# Altium PCB x-.PcbDoc
Units mm, origin at the board's own origin, x right, y up, seen from the top; angles counter-clockwise.
Board outline 327 x 80 mm, 2 copper layers (Top Layer, Bottom Layer); 121 components, 50 nets, 242 pads, 48 vias.
Unrouted connection lines stored in the file: 72.
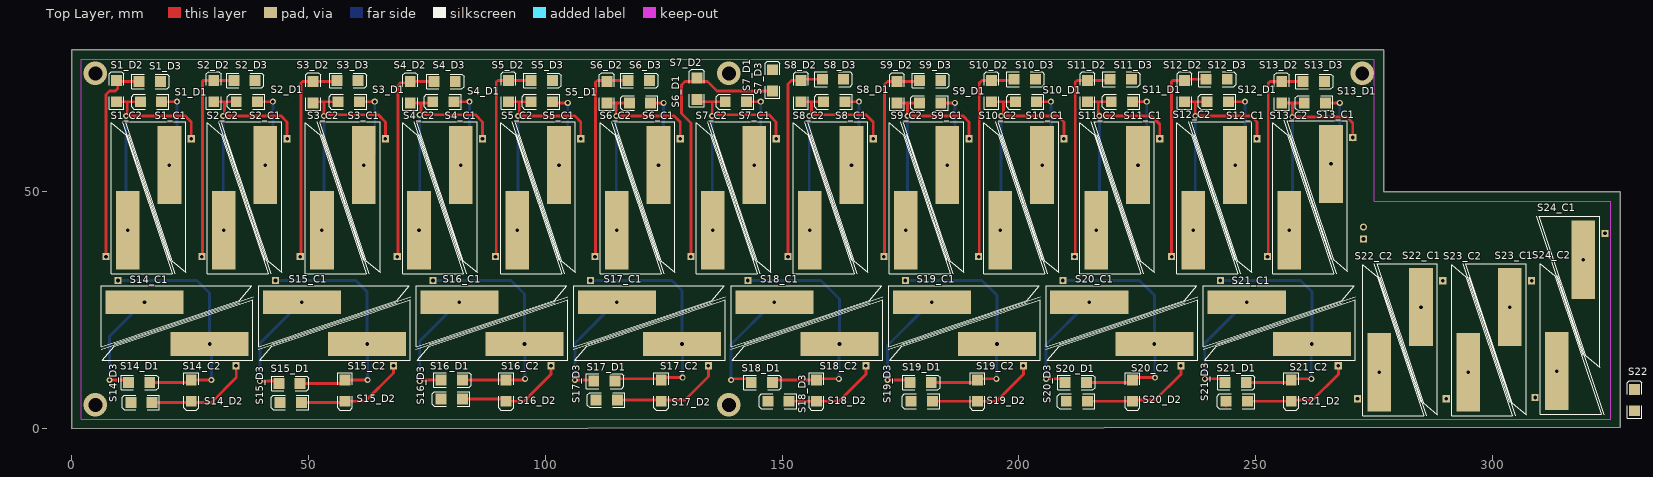
[diagram p0: Top Layer view]
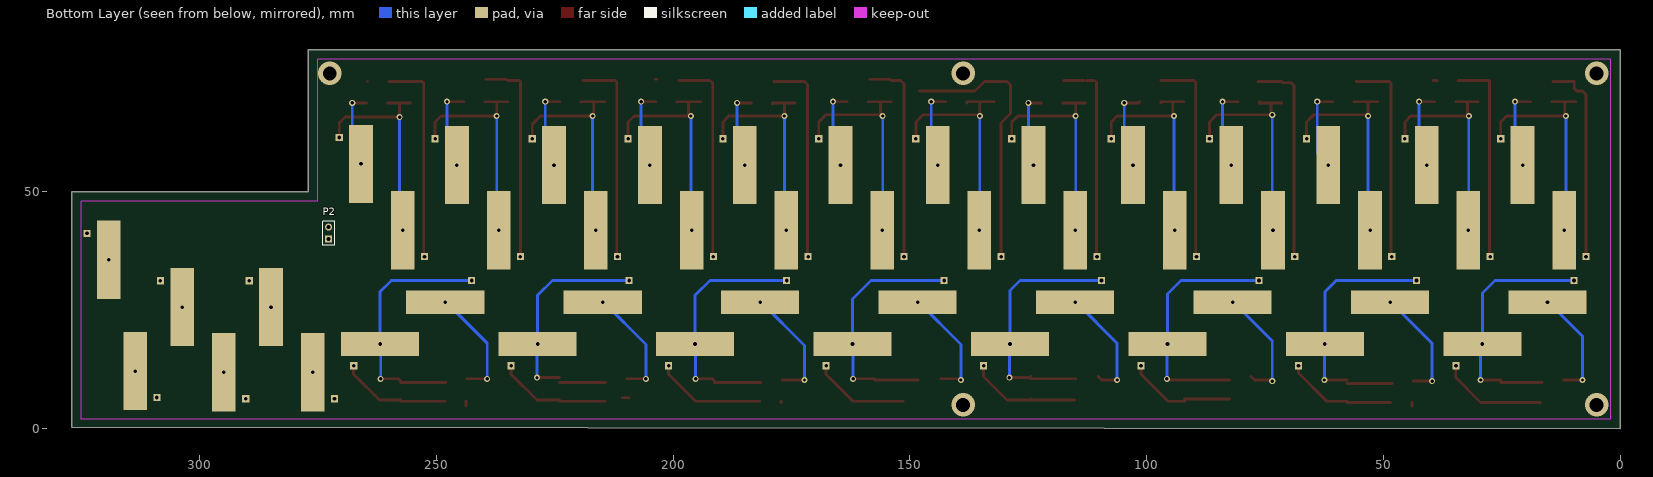
[diagram p1: Bottom Layer view, seen from below]

## Layer stack, top to bottom
Top Solder: solder mask 0.0102, Solder Resist, Dk 3.5
Top Layer: signal copper 0.0356
Dielectric 1: dielectric 0.32, FR-4, Dk 4.8
Bottom Layer: signal copper 0.0356
Bottom Solder: solder mask 0.0102, Solder Resist, Dk 3.5

## Board outline
0,0 327,0.25 327,50 277,50 277,80 0,80

## Design rules (kind name [scope] priority, off if disabled: settings)
Clearance [All] p1: gap=0.254
MinimumSolderMaskSliver [All] p1: minsoldermaskwidth=0.025
PolygonConnect [All] p1: connectstyle=Relief reliefconductorwidth=0.254 reliefentries=4 polygonreliefangle="90 Angle" airgapwidth=0.254
RoomDefinition x- [InComponentClass('x-')] p1: confinementstyle=ConfineIn formatcopy=TRUE lockcomponents=FALSE outline -113.057,-51.076 486.51,-51.076 486.51,-16.151 -113.057,-16.151
RoutingVias [All] p1: holewidth=0.711 width=1.27 viastyle="Through Hole" minholewidth=0.711 minwidth=1.27 maxholewidth=0.711 maxwidth=1.27
SilkToSolderMaskClearance [IsPad] p1: minsilkscreentomaskgap=0.025 clearancetoexposedcopper=TRUE
SolderMaskExpansion [All] p1: expansion=0.102
Width [All] p1: maxlimit=0.6 minlimit=0.6 preferedwidth=0.6
28 further rules are at their usual default settings.

## Components (designator, comment, footprint, x,y, rotation, side; value= is the part's Value field where it differs from the comment)
P2 "Header 2" HDR1X2 272.75,40 r90 bottom
S1_C1 "TASC" PCBComponent_1 25.25,61.25 r180 top
S1_C2 "TASC" PCBComponent_1 7.25,36.25 r0 top
S1_D1 "D Schottky" SMB 16.75,69 r180 top
S1_D2 "D Schottky" SMB 9.5,71.25 r90 top
S1_D3 "D Schottky" SMB 16.5,73.25 r0 top
S2_C1 "TASC" PCBComponent_1 45.5,61.25 r180 top
S2_C2 "TASC" PCBComponent_1 27.5,36.25 r0 top
S2_D1 "D Schottky" SMB 37,69 r180 top
S2_D2 "D Schottky" SMB 30,71.25 r90 top
S2_D3 "D Schottky" SMB 36.5,73.5 r0 top
S3_C1 "TASC" PCBComponent_1 66.25,61.25 r180 top
S3_C2 "TASC" PCBComponent_1 48.25,36.25 r0 top
S3_D1 "D Schottky" SMB 58.5,69 r180 top
S3_D2 "D Schottky" SMB 51,71 r90 top
S3_D3 "D Schottky" SMB 58.25,73.5 r0 top
S4_C1 "TASC" PCBComponent_1 86.75,61.25 r180 top
S4_C2 "TASC" PCBComponent_1 68.75,36.25 r0 top
S4_D1 "D Schottky" SMB 78.5,69 r180 top
S4_D2 "D Schottky" SMB 71.5,71 r90 top
S4_D3 "D Schottky" SMB 78.75,73.25 r0 top
S5_C1 "TASC" PCBComponent_1 107.5,61.25 r180 top
S5_C2 "TASC" PCBComponent_1 89.5,36.25 r0 top
S5_D1 "D Schottky" SMB 99.25,69 r180 top
S5_D2 "D Schottky" SMB 92.25,71.25 r90 top
S5_D3 "D Schottky" SMB 99.25,73.5 r0 top
S6_C1 "TASC" PCBComponent_1 128.5,61.25 r180 top
S6_C2 "TASC" PCBComponent_1 110.5,36.25 r0 top
S6_D1 "D Schottky" SMB 120,68.75 r180 top
S6_D2 "D Schottky" SMB 113,71 r90 top
S6_D3 "D Schottky" SMB 119.75,73.5 r0 top
S7_C1 "TASC" PCBComponent_1 148.75,61.25 r180 top
S7_C2 "TASC" PCBComponent_1 130.75,36.25 r0 top
S7_D1 "D Schottky" SMB 140.25,69 r180 top
S7_D2 "D Schottky" SMB 132,71.75 r90 top
S7_D3 "D Schottky" SMB 148,73.5 r90 top
S8_C1 "TASC" PCBComponent_1 169.25,61.25 r180 top
S8_C2 "TASC" PCBComponent_1 151.25,36.25 r0 top
S8_D1 "D Schottky" SMB 161,69 r180 top
S8_D2 "D Schottky" SMB 154,71.25 r90 top
S8_D3 "D Schottky" SMB 160.75,73.75 r0 top
S9_C1 "TASC" PCBComponent_1 189.5,61.25 r180 top
S9_C2 "TASC" PCBComponent_1 171.5,36.25 r0 top
S9_D1 "D Schottky" SMB 181.25,68.75 r180 top
S9_D2 "D Schottky" SMB 174.25,71 r90 top
S9_D3 "D Schottky" SMB 181.25,73.5 r0 top
S10_C1 "TASC" PCBComponent_1 209.5,61.25 r180 top
S10_C2 "TASC" PCBComponent_1 191.5,36.25 r0 top
S10_D1 "D Schottky" SMB 201.5,69 r180 top
S10_D2 "D Schottky" SMB 194.25,71.25 r90 top
S10_D3 "D Schottky" SMB 201.25,73.75 r0 top
S11_C1 "TASC" PCBComponent_1 229.75,61.25 r180 top
S11_C2 "TASC" PCBComponent_1 211.75,36.25 r0 top
S11_D1 "D Schottky" SMB 221.75,69 r180 top
S11_D2 "D Schottky" SMB 214.5,71.25 r90 top
S11_D3 "D Schottky" SMB 221.5,73.75 r0 top
S12_C1 "TASC" PCBComponent_1 250.25,61.25 r180 top
S12_C2 "TASC" PCBComponent_1 232.25,36.25 r0 top
S12_D1 "D Schottky" SMB 242,69 r180 top
S12_D2 "D Schottky" SMB 235,71.25 r90 top
S12_D3 "D Schottky" SMB 241.75,73.75 r0 top
S13_C1 "TASC" PCBComponent_1 270.5,61.5 r180 top
S13_C2 "TASC" PCBComponent_1 252.5,36.25 r0 top
S13_D1 "D Schottky" SMB 262.5,68.75 r180 top
S13_D2 "D Schottky" SMB 255.5,71 r90 top
S13_D3 "D Schottky" SMB 262.25,73.25 r0 top
S14_C1 "TASC" PCBComponent_1 9.75,31.25 r270 top
S14_C2 "TASC" PCBComponent_1 34.75,13.25 r90 top
S14_D1 "D Schottky" SMB 14.25,9.75 r0 top
S14_D2 "D Schottky" SMB 25.25,8 r270 top
S14_D3 "D Schottky" SMB 14.75,5.5 r180 top
S15_C1 "TASC" PCBComponent_1 43,31.25 r270 top
S15_C2 "TASC" PCBComponent_1 68,13.25 r90 top
S15_D1 "D Schottky" SMB 46,9.5 r0 top
S15_D2 "D Schottky" SMB 57.75,8 r270 top
S15_D3 "D Schottky" SMB 46.25,5.5 r180 top
S16_C1 "TASC" PCBComponent_1 76.25,31.25 r270 top
S16_C2 "TASC" PCBComponent_1 101.25,13.25 r90 top
S16_D1 "D Schottky" SMB 80.25,10.25 r0 top
S16_D2 "D Schottky" SMB 91.75,8 r270 top
S16_D3 "D Schottky" SMB 80.25,6.25 r180 top
S17_C1 "TASC" PCBComponent_1 109.5,31.25 r270 top
S17_C2 "TASC" PCBComponent_1 134.5,13.25 r90 top
S17_D1 "D Schottky" SMB 112.5,10 r0 top
S17_D2 "D Schottky" SMB 124.5,8 r270 top
S17_D3 "D Schottky" SMB 113,6 r180 top
S18_C1 "TASC" PCBComponent_1 142.75,31.25 r270 top
S18_C2 "TASC" PCBComponent_1 167.75,13.25 r90 top
S18_D1 "D Schottky" SMB 145.75,9.75 r0 top
S18_D2 "D Schottky" SMB 157.25,8 r270 top
S18_D3 "D Schottky" SMB 149.25,5.75 r180 top
S19_C1 "TASC" PCBComponent_1 176,31.25 r270 top
S19_C2 "TASC" PCBComponent_1 201,13.25 r90 top
S19_D1 "D Schottky" SMB 179.25,9.75 r0 top
S19_D2 "D Schottky" SMB 191.25,8 r270 top
S19_D3 "D Schottky" SMB 179.5,5.75 r180 top
S20_C1 "TASC" PCBComponent_1 209.25,31.25 r270 top
S20_C2 "TASC" PCBComponent_1 234.25,13.25 r90 top
S20_D1 "D Schottky" SMB 212,9.75 r0 top
S20_D2 "D Schottky" SMB 224,8 r270 top
S20_D3 "D Schottky" SMB 212.25,5.75 r180 top
S21_C1 "TASC" PCBComponent_1 242.5,31.25 r270 top
S21_C2 "TASC" PCBComponent_1 267.5,13.25 r90 top
S21_D1 "D Schottky" SMB 245.75,9.75 r0 top
S21_D2 "D Schottky" SMB 257.5,8 r270 top
S21_D3 "D Schottky" SMB 246,5.75 r180 top
S22_C1 "TASC" PCBComponent_1 289.5,31.25 r180 top
S22_C2 "TASC" PCBComponent_1 271.5,6.25 r0 top
S22_D1 "D Schottky" SMB 350.999,6 r90 top
S22_D2 "D Schottky" SMB 340.499,6 r90 top
S22_D3 "D Schottky" SMB 329.999,6 r90 top
S23_C1 "TASC" PCBComponent_1 308.25,31.25 r180 top
S23_C2 "TASC" PCBComponent_1 290.25,6.25 r0 top
S23_D1 "D Schottky" SMB 381.749,6 r90 top
S23_D2 "D Schottky" SMB 371.249,6 r90 top
S23_D3 "D Schottky" SMB 360.749,6 r90 top
S24_C1 "TASC" PCBComponent_1 323.75,41.25 r180 top
S24_C2 "TASC" PCBComponent_1 309,6.5 r0 top
S24_D1 "D Schottky" SMB 384.249,29.75 r90 top
S24_D2 "D Schottky" SMB 373.999,29.75 r90 top
S24_D3 "D Schottky" SMB 363.499,29.75 r90 top

## Footprints (in the part's own frame and the unit in brackets; to place one, negate y for a bottom-side part, rotate by r counter-clockwise, add the part's x,y. Pads: shape width x height; smd on the part's side, far side on the other; paste and mask are expansions set on the pad)
HDR1X2 [mm] "Connector; Header; 2 Position"
  rect 1.5x1.5 hole 0.9: 1(0,0)
  round 1.5 hole 0.9: 2(2.54,0)
  silkscreen extent -1.27,-1.27 3.81,1.27
PCBComponent_1 [mm]
  rect 1.524x1.524 hole 0.762: 1(0,0.044)
  rect 5x16.5 hole 0.762: 2(4.6,5.625)
  silkscreen extent 1.13,-3.55 14.53,28.3
SMB [mm] "DO-214-AA/SMB; 2 C-Bend Leads; Body 5.3 x 3.6 mm, inc. leads (LxW)"
  rect 2.3x2.3 smd: 1(-2.25,0) 2(2.25,0)
  silkscreen extent -3.8,-1.55 4.1,1.55

## Part data
P2: "Header, 2-Pin"
S1_C1 S1_C2 S2_C1 S2_C2 S3_C1 S3_C2 S4_C1 S4_C2 S5_C1 S5_C2 S6_C1 S6_C2 S7_C1 S7_C2 S8_C1 S8_C2 S9_C1 S9_C2 S10_C1 S10_C2 S11_C1 S11_C2 S12_C1 S12_C2 S13_C1 S13_C2 S14_C1 S14_C2 S15_C1 S15_C2 S16_C1 S16_C2 S17_C1 S17_C2 S18_C1 S18_C2 S19_C1 S19_C2 S20_C1 S20_C2 S21_C1 S21_C2 S22_C1 S22_C2 S23_C1 S23_C2 S24_C1 S24_C2: "TASC Solar Cell"
S1_D1 S1_D2 S1_D3 S2_D1 S2_D2 S2_D3 S3_D1 S3_D2 S3_D3 S4_D1 S4_D2 S4_D3 S5_D1 S5_D2 S5_D3 S6_D1 S6_D2 S6_D3 S7_D1 S7_D2 S7_D3 S8_D1 S8_D2 S8_D3 S9_D1 S9_D2 S9_D3 S10_D1 S10_D2 S10_D3 S11_D1 S11_D2 S11_D3 S12_D1 S12_D2 S12_D3 S13_D1 S13_D2 S13_D3 S14_D1 S14_D2 S14_D3 S15_D1 S15_D2 S15_D3 S16_D1 S16_D2 S16_D3 S17_D1 S17_D2 S17_D3 S18_D1 S18_D2 S18_D3 S19_D1 S19_D2 S19_D3 S20_D1 S20_D2 S20_D3 S21_D1 S21_D2 S21_D3 S22_D1 S22_D2 S22_D3 S23_D1 S23_D2 S23_D3 S24_D1 S24_D2 S24_D3: "Schottky Diode"

## Via types
v1: diameter 1.27, hole 0.711, Top Layer to Bottom Layer, 42 vias
v2: diameter 5, hole 2.946, Top Layer to Bottom Layer, 6 vias

## Nets (pads, with @x,y where several pads share a name; then routed paths per layer and width w, separated by ;. In a path a pad name is that pad's centre, name@x,y a point inside that pad or via, vN(x,y) a via of type N, cw(c..) or ccw(c..) an arc to the next point about the centre after c; other vN are vias at no path point)
GND: P2.2 S1_C1.2 S1_D1.1 S2_C1.2 S2_D1.1 S3_C1.2 S3_D1.1 S4_C1.2 S4_D1.1 S5_C1.2 S5_D1.1 S6_C1.2 S6_D1.1 S7_C1.2 S7_D1.1 S8_C1.2 S8_D1.1 S9_C1.2 S9_D1.1 S10_C1.2 S10_D1.1 S11_C1.2 S11_D1.1 S12_C1.2 S12_D1.1 S13_C1.2 S13_D1.1 S14_C1.2 S14_D1.1 S15_C1.2 S15_D1.1 S16_C1.2 S16_D1.1 S17_C1.2 S17_D1.1 S18_C1.2 S18_D1.1 S19_C1.2 S19_D1.1 S20_C1.2 S20_D1.1 S21_C1.2 S21_D1.1 S22_C1.2 S22_D1.1 S23_C1.2 S23_D1.1 S24_C1.2 S24_D1.1 | length 414.4
  Top Layer w0.6: v1@7.75,10.25 S14_D1.1@12,10.25 ; S1_D1.1 v1(22.25,69) ; S2_D1.1 v1(42.5,69) ; v1(39.75,10) S15_D1.1@43.75,10 ; S3_D1.1 v1(64,69) ; v1(73.5,10) 73.75,10.25 77.25,10.25 S16_D1.1@78,11 ; S4_D1.1 v1(84,69) ; S5_D1.1 101.75,68.75 v1(104.75,68.75) ; v1(106.25,10.25) 109.5,10.25 S17_D1.1@110.25,11 ; S6_D1.1 v1(125,68.75) ; v1(139.25,10.25) 139.5,10.5 S18_D1.1@143.5,10.5 ; S7_D1.1 v1(145.5,69) ; S8_D1.1 v1(166.25,69) ; v1(172.25,10.25) S19_D1.1@177,10.25 ; S9_D1.1 v1(186.5,68.75) ; S10_D1.1 v1(206.75,69) ; v1(205.75,10.5) S20_D1.1@209.75,10.5 ; S11_D1.1 v1(227,69) ; v1(239.25,10.5) S21_D1.1@243.5,10.5 ; S12_D1.1 v1(247.75,69) ; S13_D1.1 v1(267.75,68.75)
  Bottom Layer w0.6: v1(8,10.25) 8,19.5 S14_C1.2@15.15,26.65 ; S1_C1.2@20.65,55.85 22.25,57.45 v1(22.25,69) ; v1(39.75,10) 39.75,18 S15_C1.2@48.4,26.65 ; S2_C1.2@40.9,55.85 42.5,57.45 v1(42.5,69) ; S3_C1.2@61.65,55.85 64,58.2 v1(64,69) ; v1(73.5,10) 73.5,18.5 S16_C1.2@81.65,26.65 ; S4_C1.2@82.15,55.85 84,57.7 v1(84,69) ; S5_C1.2@102.9,55.85 104.75,57.7 v1(104.75,68.75) ; v1(106.25,10.25) 106.25,18 S17_C1.2@114.9,26.65 ; S6_C1.2@123.9,55.85 125,56.95 v1(125,68.75) ; v1(139.25,10.25) 139.25,17.75 S18_C1.2@148.15,26.65 ; S7_C1.2@144.15,55.85 145.5,57.2 v1(145.5,69) ; S8_C1.2@164.65,55.85 166.25,57.45 v1(166.25,69) ; v1(172.25,10.25) 172.25,17.5 S19_C1.2@181.4,26.65 ; S9_C1.2@184.9,55.85 186.5,57.45 v1(186.5,68.75) ; S10_C1.2@204.9,55.85 206.75,57.7 v1(206.75,69) ; v1(205.75,10.5) 205.75,17.75 S20_C1.2@214.65,26.65 ; S11_C1.2@225.15,55.85 227,57.7 v1(227,69) ; v1(239.25,10.5) 239.25,18 S21_C1.2@247.9,26.65 ; S12_C1.2@245.65,55.85 247.75,57.95 v1(247.75,69) ; S13_C1.2@265.9,55.6 267.75,57.45 v1(267.75,68.75)
  other v2: 5,5 138.75,5 335.5,51.5 5,75 138.75,75 272.5,75
NetS1_C1_1: S1_C1.1 S1_C2.2 S1_D1.2 S1_D2.1 | length 50.4
  Top Layer w0.6: S1_D2.1 11.75,69 ; S1_D1.2 11.75,69 ; S1_C1.1 25.25,64.75 24,66 v1(11.5,66) 11.75,66.25 11.75,69
  Bottom Layer w0.6: v1(11.5,66) 11.5,42 S1_C2.2@11.85,41.65
NetS1_C2_1: S1_C2.1 S1_D2.2 S1_D3.1 | length 43.2
  Top Layer w0.6: S1_C2.1 7.25,70.5 8,71.25 9.2,71.25 9.746,71.796 S1_D2.2@9.746,73.254 ; S1_D2.2@9.75,73.25 S1_D3.1
NetS2_C1_1: S2_C1.1 S2_C2.2 S2_D1.2 S2_D2.1 | length 49.7
  Top Layer w0.6: S2_D2.1 32.25,69 ; S2_D1.2 32.25,69 ; S2_C1.1 45.5,64.75 44.25,66 v1(32,66) 32,66.25 32.25,66.5 32.25,69
  Bottom Layer w0.6: S2_C2.2@32,41.75 v1(32,66)
NetS2_C2_1: S2_C2.1 S2_D2.2 S2_D3.1 | length 43.8
  Top Layer w0.6: S2_C2.1 27.643,36.437 27.643,73.393 27.75,73.5 S2_D2.2 S2_D3.1
NetS3_C1_1: S3_C1.1 S3_C2.2 S3_D1.2 S3_D2.1 | length 49.4
  Top Layer w0.6: S3_D2.1@51.25,69 53.25,69 ; v1(53.25,66) 53.25,69 ; v1@53.5,66.25 64.75,66.25 66.25,64.75 S3_C1.1 ; S3_D1.2 53.25,69
  Bottom Layer w0.6: S3_C2.2@52.85,41.65 53.25,42.05 v1(53.25,66)
NetS3_C2_1: S3_C2.1 S3_D2.2 S3_D3.1 | length 44.2
  Top Layer w0.6: S3_C2.1 48.393,36.437 48.393,72.893 48.75,73.25 S3_D2.2 S3_D3.1@55.75,73.25
NetS4_C1_1: S4_C1.1 S4_C2.2 S4_D1.2 S4_D2.1 | length 48.5
  Top Layer w0.6: S4_D2.1 73.75,68.75 ; v1@73.75,66.5 73.75,68.75 ; v1@74,66.25 85.25,66.25 86.75,64.75 S4_C1.1 ; S4_D1.2@76,68.75 73.75,68.75 ; S4_D1.2@76.125,68.625 76.25,68.75 S4_D1.2
  Bottom Layer w0.6: S4_C2.2@73.5,41.8 v1(73.5,66.25)
NetS4_C2_1: S4_C2.1 S4_D2.2 S4_D3.1 | length 43.9
  Top Layer w0.6: S4_C2.1 68.893,36.294 68.893,72.393 69.5,73 S4_D2.2@71.25,73 ; S4_D2.2 S4_D3.1
NetS5_C1_1: S5_C1.1 S5_C2.2 S5_D1.2 S5_D2.1 | length 49.3
  Top Layer w0.6: S5_D2.1 94.5,69 ; v1(94.25,66) 106.25,66 107.5,64.75 S5_C1.1 ; v1@94.5,66.25 94.5,69 ; S5_D1.2@97,68.75 S5_D1.2 94.5,69
  Bottom Layer w0.6: S5_C2.2@94.25,41.8 v1(94.25,66)
NetS5_C2_1: S5_C2.1 S5_D2.2 S5_D3.1 | length 44.5
  Top Layer w0.6: S5_C2.1 89.643,36.294 89.643,73.143 90,73.5 S5_D3.1
NetS6_C1_1: S6_C1.1 S6_C2.2 S6_D1.2 S6_D2.1 | length 49.3
  Top Layer w0.6: S6_D2.1 115,68.75 ; S6_D1.2 115,68.75 ; S6_C1.1 128.5,64.75 127.25,66 v1(115,66) 115,68.75
  Bottom Layer w0.6: S6_C2.2@115,41.75 v1(115,66)
NetS6_C2_1: S6_C2.1 S6_D2.2 S6_D3.1 | length 43.5
  Top Layer w0.6: S6_C2.1 110.643,36.294 110.643,73.143 111,73.5 S6_D2.2@112.75,73.5 ; S6_D2.2@113.25,73.5 S6_D3.1
NetS7_C1_1: S7_C1.1 S7_C2.2 S7_D1.2 S7_D2.1 | length 50.7
  Top Layer w0.6: S7_D2.1@132.25,69 135.25,69 ; S7_D1.2@138,68.75 S7_D1.2 135.25,69 ; S7_C1.1 148.75,64.75 147.25,66.25 135.25,66.25 135.25,69
  Bottom Layer w0.6: S7_C2.2@135.25,41.75 v1(135.25,66)
NetS7_C2_1: S7_C2.1 S7_D2.2 S7_D3.1 | length 57.6
  Top Layer w0.6: S7_C2.1@130.893,36.294 S7_C2.1 130.75,64.5 128.75,66.5 128.75,72.5 129.5,73.25 132,73.25 134.25,73.25 136.25,71.25 S7_D3.1
NetS8_C1_1: S8_C1.1 S8_C2.2 S8_D1.2 S8_D2.1 | length 48.9
  Top Layer w0.6: S8_D2.1 156.25,69 ; S8_D1.2 156.25,69 ; S8_C1.1 169.25,64.75 167.75,66.25 156.25,66.25 156.25,69
  Bottom Layer w0.6: S8_C2.2@155.75,41.75 v1(155.75,66)
NetS8_C2_1: S8_C2.1 S8_D2.2 S8_D3.1 | length 43.8
  Top Layer w0.6: S8_C2.1 151.25,72.75 152,73.5 S8_D2.2 ; S8_D2.2@154.25,73.75 S8_D3.1
NetS9_C1_1: S9_C1.1 S9_C2.2 S9_D1.2 S9_D2.1 | length 48.8
  Top Layer w0.6: S9_D2.1 176.5,68.75 ; S9_D1.2@179,68.5 S9_D1.2 176.5,68.75 ; S9_C1.1 189.5,64.75 188.25,66 v1(176.5,66) 176.5,68.75
  Bottom Layer w0.6: S9_C2.2@176.5,42.05 v1(176.5,66)
NetS9_C2_1: S9_C2.1 S9_D2.2 S9_D3.1 | length 43.9
  Top Layer w0.6: S9_C2.1 171.643,36.294 171.643,72.643 172.25,73.25 S9_D2.2 S9_D3.1@178.75,73.25
NetS10_C1_1: S10_C1.1 S10_C2.2 S10_D1.2 S10_D2.1 | length 49
  Top Layer w0.6: S10_D2.1 196.75,69 ; v1@196.5,66 208.25,66 209.5,64.75 S10_C1.1 ; 196.75,66.5 196.75,69 ; S10_D1.2 196.75,69
  Bottom Layer w0.6: S10_C2.2@196.1,41.65 196.25,41.8 v1(196.25,66)
NetS10_C2_1: S10_C2.1 S10_D2.2 S10_D3.1 | length 44.1
  Top Layer w0.6: S10_C2.1 191.643,36.294 191.643,72.893 192.25,73.5 S10_D2.2 S10_D3.1@198.75,73.5
NetS11_C1_1: S11_C1.1 S11_C2.2 S11_D1.2 S11_D2.1 | length 49.4
  Top Layer w0.6: S11_D2.1 216.75,69 ; v1@216.75,66.25 216.75,69 ; v1@217,66.5 v1(217,66) 228,66 229.75,64.25 S11_C1.1 ; S11_D1.2 216.75,69
  Bottom Layer w0.6: S11_C2.2@216.35,41.65 217,42.3 v1(217,66)
NetS11_C2_1: S11_C2.1 S11_D2.2 S11_D3.1 | length 44.2
  Top Layer w0.6: S11_C2.1 211.893,36.294 211.893,73.143 212.25,73.5 S11_D2.2 S11_D3.1@219,73.5
NetS12_C1_1: S12_C1.1 S12_C2.2 S12_D1.2 S12_D2.1 | length 49.3
  Top Layer w0.6: S12_D2.1 237.25,69 ; S12_D1.2 237.25,69 ; S12_C1.1 250.25,64.75 249,66 v1(237.25,66) 237.25,69
  Bottom Layer w0.6: S12_C2.2@236.85,41.65 237.25,42.05 v1(237.25,66)
NetS12_C2_1: S12_C2.1 S12_D2.2 S12_D3.1 | length 44.1
  Top Layer w0.6: S12_C2.1 232.25,73.25 232.5,73.5 S12_D2.2 ; S12_D2.2@235.25,73.75 S12_D3.1
NetS13_C1_1: S13_C1.1 S13_C2.2 S13_D1.2 S13_D2.1 | length 50.7
  Top Layer w0.6: S13_D2.1 S13_D1.2 257.875,68.75 ; v1(257.75,65.75) 257.75,68.625 ; v1@258.25,65.75 269.25,65.75 270.5,64.5 S13_C1.1@270.5,60.956
  Bottom Layer w0.6: S13_C2.2@257.1,41.65 257.75,42.3 v1(257.75,65.75)
NetS13_C2_1: S13_C2.1 S13_D2.2 S13_D3.1 | length 44.2
  Top Layer w0.6: S13_C2.1 252.643,36.294 252.643,72.893 253,73.25 S13_D2.2 S13_D3.1
NetS14_C1_1: S14_C1.1 S14_C2.2 S14_D1.2 S14_D2.1 | length 51.1
  Top Layer w0.6: S14_D1.2 S14_D2.1@25.25,9.75 ; S14_D2.1 v1@29,10.25
  Bottom Layer w0.6: S14_C1.1 26.5,31.25 29.125,28.625 S14_C2.2 ; v1(29.5,10.25) S14_C2.2@29.5,17.7
NetS14_C2_1: S14_C2.1 S14_D2.2 S14_D3.1 | length 22.4
  Top Layer w0.6: S14_D3.1 29.5,5.5 34.75,10.75 S14_C2.1@34.75,13.206
NetS15_C1_1: S15_C1.1 S15_C2.2 S15_D1.2 S15_D2.1 | length 53.3
  Top Layer w0.6: S15_D1.2 S15_D2.1@57.75,9.5 ; S15_D2.1 59.25,10.25 v1(62.5,10.25)
  Bottom Layer w0.6: S15_C1.1 60,31.25 62.375,28.875 S15_C2.2 ; v1(62.5,10.25) S15_C2.2@62.5,17.95
NetS15_C2_1: S15_C2.1 S15_D2.2 S15_D3.1 | length 23.5
  Top Layer w0.6: S15_D3.1 S15_D2.2@57.75,5.5 ; S15_D2.2 62,5.75 67.956,11.706 S15_C2.1
NetS16_C1_1: S16_C1.1 S16_C2.2 S16_D1.2 S16_D2.1 | length 51.3
  Top Layer w0.6: S16_D1.2 S16_D2.1 v1@95.5,10.25
  Bottom Layer w0.6: S16_C1.1 92.75,31.25 95.625,28.375 S16_C2.2 ; v1(95.75,10.5) S16_C2.2@95.75,17.75
NetS16_C2_1: S16_C2.1 S16_D2.2 S16_D3.1 | length 22.9
  Top Layer w0.6: S16_D3.1 S16_D2.2@92,6.25 ; S16_D2.2@92,5.75 95.5,5.75 101.206,11.456 S16_C2.1
NetS17_C1_1: S17_C1.1 S17_C2.2 S17_D1.2 S17_D2.1 | length 52.6
  Top Layer w0.6: S17_D1.2@115,10.5 S17_D2.1@124.5,10.5 ; S17_D2.1@124.5,11 124.75,10.75 v1(129,10.75)
  Bottom Layer w0.6: S17_C1.1 126.75,31.25 128.875,29.125 S17_C2.2 ; v1(129,10.75) S17_C2.2@129,17.75
NetS17_C2_1: S17_C2.1 S17_D2.2 S17_D3.1 | length 23.7
  Top Layer w0.6: S17_D3.1 S17_D2.2@124.5,6 ; S17_D2.2@124.5,6.25 124.75,6 129.5,6 134.456,10.956 S17_C2.1
NetS18_C1_1: S18_C1.1 S18_C2.2 S18_D1.2 S18_D2.1 | length 51.2
  Top Layer w0.6: S18_D1.2@148.25,10.25 S18_D2.1@157.5,10.25 ; S18_D2.1@157.5,10.5 v1(162,10.5)
  Bottom Layer w0.6: S18_C1.1 148.25,31.25 158.25,31.25 162.125,27.375 S18_C2.2 ; v1(162,10.5) S18_C2.2@162,17.5
NetS18_C2_1: S18_C2.1 S18_D2.2 S18_D3.1 | length 20.4
  Top Layer w0.6: S18_D3.1 S18_D2.2 162,5.75 167.706,11.456 S18_C2.1
NetS19_C1_1: S19_C1.1 S19_C2.2 S19_D1.2 S19_D2.1 | length 52.2
  Top Layer w0.6: S19_D1.2 S19_D2.1@191.25,9.75 ; S19_D2.1@191.25,10 191.75,10.5 v1(195.25,10.5)
  Bottom Layer w0.6: S19_C1.1 192.25,31.25 195.375,28.125 S19_C2.2 ; v1(195.25,10.5) 195.25,17.5 S19_C2.2@195.5,17.75
NetS19_C2_1: S19_C2.1 S19_D2.2 S19_D3.1 | length 23.4
  Top Layer w0.6: S19_D3.1 S19_D2.2 195.25,5.75 200.956,11.456 S19_C2.1
NetS20_C1_1: S20_C1.1 S20_C2.2 S20_D1.2 S20_D2.1 | length 51.9
  Top Layer w0.6: S20_D1.2 S20_D2.1@224,9.75 ; S20_D2.1@224,10.75 v1@228.25,10.75
  Bottom Layer w0.6: S20_C1.1 225.5,31.25 228.625,28.125 S20_C2.2 ; v1(228.75,10.75) S20_C2.2@228.75,17.75
NetS20_C2_1: S20_C2.1 S20_D2.2 S20_D3.1 | length 23.8
  Top Layer w0.6: S20_D3.1 S20_D2.2 ; S20_D2.2@224,6 228.75,6 234.206,11.456 S20_C2.1
NetS21_C1_1: S21_C1.1 S21_C2.2 S21_D1.2 S21_D2.1 | length 52.7
  Top Layer w0.6: S21_D1.2 S21_D2.1@257.5,9.75 ; S21_D2.1@257.5,10 258,10.5 v1(261.75,10.5)
  Bottom Layer w0.6: S21_C1.1 259.5,31.25 261.875,28.875 S21_C2.2 ; v1(261.75,10.5) 261.75,17.5 S21_C2.2@262,17.75
NetS21_C2_1: S21_C2.1 S21_D2.2 S21_D3.1 | length 23.3
  Top Layer w0.6: S21_D3.1 S21_D2.2 ; S21_D2.2@257.5,6 262,6 267.456,11.456 S21_C2.1
NetS22_C1_1: S22_C1.1 S22_C2.2 S22_D1.2 S22_D2.1
NetS22_C2_1: S22_C2.1 S22_D2.2 S22_D3.1
NetS23_C1_1: S23_C1.1 S23_C2.2 S23_D1.2 S23_D2.1
NetS23_C2_1: S23_C2.1 S23_D2.2 S23_D3.1
NetS24_C1_1: S24_C1.1 S24_C2.2 S24_D1.2 S24_D2.1
NetS24_C2_1: S24_C2.1 S24_D2.2 S24_D3.1
POSITIVE: P2.1 S1_D3.2 S2_D3.2 S3_D3.2 S4_D3.2 S5_D3.2 S6_D3.2 S7_D3.2 S8_D3.2 S9_D3.2 S10_D3.2 S11_D3.2 S12_D3.2 S13_D3.2 S14_D3.2 S15_D3.2 S16_D3.2 S17_D3.2 S18_D3.2 S19_D3.2 S20_D3.2 S21_D3.2 S22_D3.2 S23_D3.2 S24_D3.2 | length 4.5
  Top Layer w0.6: S2_D3.2 S2_D3.2@39.5,73.5 ; S15_D3.2@44,4.75 S15_D3.2 ; S19_D3.2@177.25,5.5 S19_D3.2 ; S10_D3.2 S10_D3.2@203.75,73.75 ; S20_D3.2@209.25,6.5 S20_D3.2@210.75,6.5 ; S21_D3.2@243.75,4.75 S21_D3.2

## Keep-outs
Keep-Out Layer:
  lines w0.1: -129,-78 -132,-78 -99,-78 ; 2,2 275,2 325,2 325,48 275,48 275,78 2,78 2,2